# Altium PCB uTCA_MCH_PCB3.pcbdoc (part 6 of 8)
Units mm, origin at the board's own origin, x right, y up, seen from the top; angles counter-clockwise.
Board outline 182.75 x 75.8 mm, 10 copper layers (Top Layer, GND1, MidLayer1, PWR1, Mid-Layer 2, GND2, PWR2, Mid-Layer 3, GND3, Bottom Layer), stack 1.568 mm thick; 778 components, 977 nets, 4756 pads, 1214 vias.
Unrouted connection lines stored in the file: 1790.
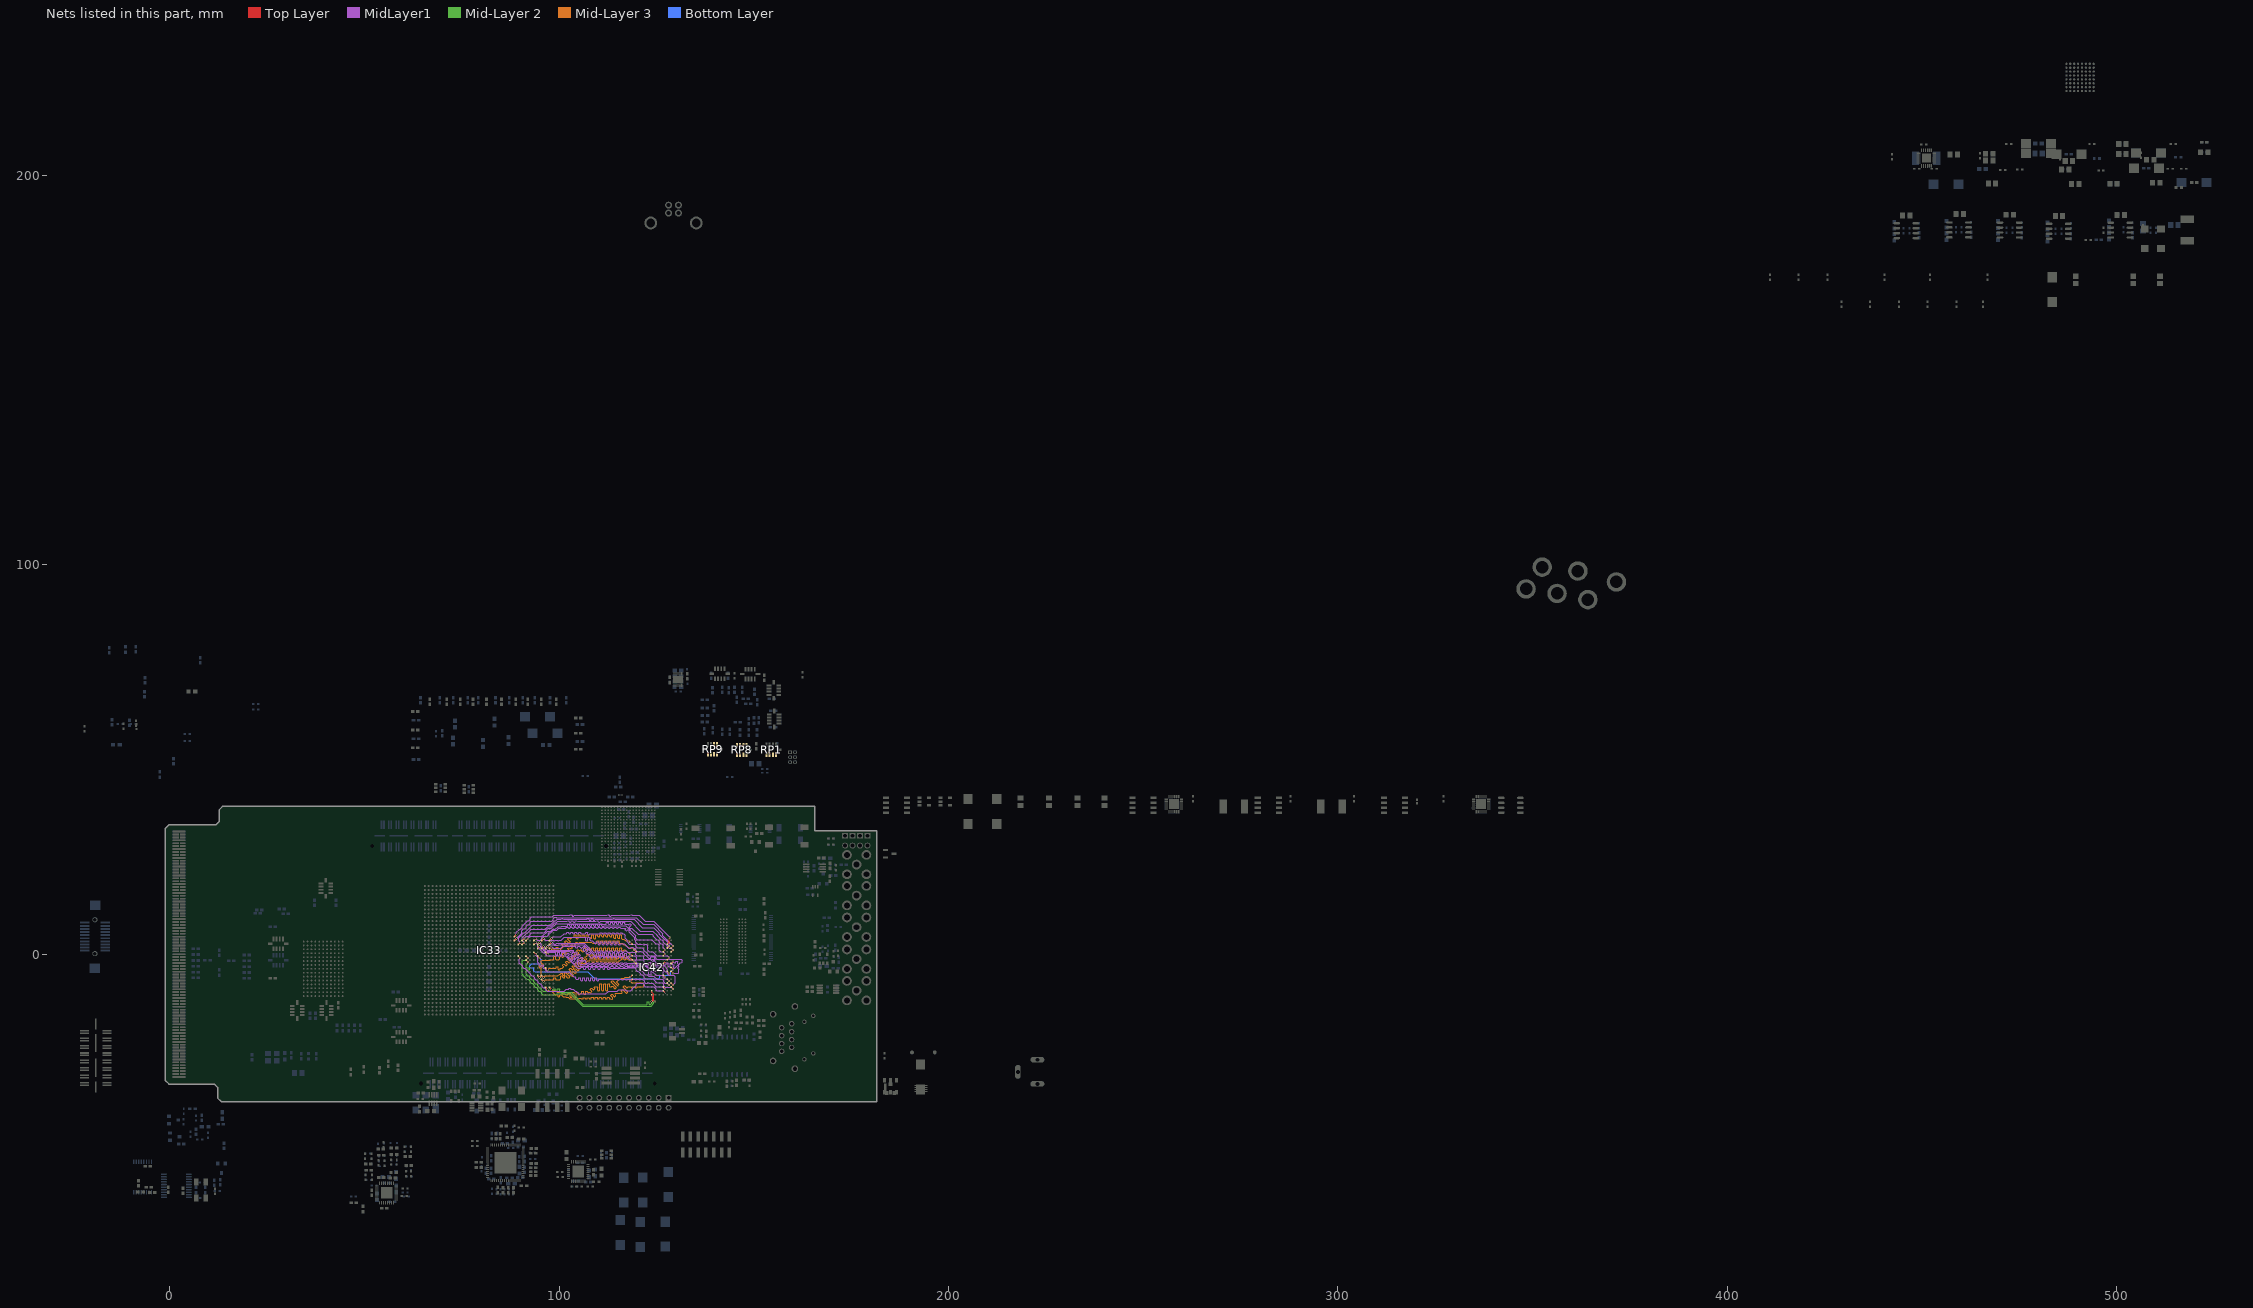
[diagram p14: the nets of this part, all layers, seen from the top]

## Via types
v1: diameter 0.5, hole 0.2, Top Layer to Bottom Layer, 1149 vias
v2: diameter 0.508, hole 0.254, Top Layer to Bottom Layer, 32 vias
v3: diameter 0.66, hole 0.33, Top Layer to Bottom Layer, tented top, 29 vias
v4: diameter 0.5, hole 0.2, Top Layer to Bottom Layer, tented top, 4 vias

## Nets (pads, with @x,y where several pads share a name; then routed paths per layer and width w, separated by ;. In a path a pad name is that pad's centre, name@x,y a point inside that pad or via, vN(x,y) a via of type N, cw(c..) or ccw(c..) an arc to the next point about the centre after c; other vN are vias at no path point) (continued)
Q1_D18: IC33.K19 IC42.B3 RP9.8 | length 48.1
  Top Layer w0.175: IC33.K19@89.5,-0.5 v1(90,-1) ; IC42.B3@126.75,-9.4 v1(127.25,-9.9)
  MidLayer1 w0.109: v1(90,-1) 89.571,-1.429 89.571,-2.178 89.822,-2.43 90.037,-2.43 90.571,-2.963 90.571,-3.178 90.963,-3.571 91.178,-3.571 92.571,-4.963 92.571,-5.178 92.963,-5.571 93.178,-5.571 93.571,-5.963 93.571,-6.178 93.963,-6.571 94.178,-6.571 94.571,-6.963 94.571,-7.178 94.963,-7.571 95.178,-7.571 95.571,-7.963 95.571,-8.178 95.963,-8.571 96.178,-8.571 96.571,-8.963 96.571,-9.178 96.943,-9.55 101.35,-9.55 101.85,-9.05 102.355,-9.05 102.458,-8.947 102.458,-8.809 102.561,-8.706 102.87,-8.706 102.973,-8.809 102.973,-8.947 103.076,-9.05 103.6,-9.05 104.1,-9.55 104.35,-9.55 105,-10.2 112,-10.2 112.7,-9.5 114.95,-9.5 115.3,-9.15 117,-9.15 117.18,-9.33 118.428,-9.33 118.87,-8.887 118.87,-8.772 119.122,-8.52 119.237,-8.52 119.82,-7.937 119.82,-7.722 120.072,-7.471 121.428,-7.471 121.82,-7.863 121.82,-8.078 122.143,-8.4 124.357,-8.4 124.82,-8.863 124.82,-9.078 125.093,-9.35 126.7,-9.35 v1(127.25,-9.9)
Q1_D19: IC33.F18 IC42.C3 RP9.7 | length 48.2
  Top Layer w0.175: IC33.F18@93.5,0.5 v1(94,0) ; IC42.C3@126.75,-8.4 v1(127.25,-8.9)
  MidLayer1 w0.109: v1(94,0) 94,-0.3 94.45,-0.75 94.45,-2.057 94.924,-2.531 94.924,-2.677 94.86,-2.741 94.86,-2.886 95.079,-3.105 95.225,-3.105 95.361,-2.969 95.623,-2.707 95.769,-2.707 95.987,-2.926 95.987,-3.071 95.798,-3.26 95.798,-3.406 95.963,-3.571 96.178,-3.571 96.571,-3.963 96.571,-4.178 96.893,-4.5 102.5,-4.5 103.78,-5.78 103.926,-5.78 103.948,-5.759 104.094,-5.759 104.313,-5.977 104.313,-6.123 104.291,-6.145 104.291,-6.291 104.4,-6.4 104.935,-6.4 105.038,-6.297 105.038,-6.103 105.141,-6 105.451,-6 105.554,-6.103 105.554,-6.697 105.657,-6.8 105.966,-6.8 106.069,-6.697 106.069,-6.103 106.172,-6 106.481,-6 106.585,-6.103 106.585,-6.697 106.688,-6.8 106.997,-6.8 107.1,-6.697 107.1,-6.103 107.203,-6 107.512,-6 107.615,-6.103 107.615,-6.697 107.718,-6.8 108.028,-6.8 108.131,-6.697 108.131,-6.103 108.234,-6 108.543,-6 108.646,-6.103 108.646,-6.697 108.749,-6.8 109.058,-6.8 109.162,-6.697 109.162,-6.103 109.265,-6 109.574,-6 109.677,-6.103 109.677,-6.697 109.78,-6.8 110.089,-6.8 110.192,-6.697 110.192,-6.503 110.295,-6.4 114.965,-6.4 115.065,-6.5 115.381,-6.5 115.481,-6.4 115.996,-6.4 116.096,-6.5 116.412,-6.5 116.512,-6.4 117.027,-6.4 117.127,-6.5 117.442,-6.5 117.542,-6.4 118.373,-6.4 118.473,-6.5 118.788,-6.5 118.888,-6.4 119.404,-6.4 119.504,-6.5 119.819,-6.5 119.919,-6.4 120.435,-6.4 120.535,-6.5 120.85,-6.5 120.95,-6.4 121.357,-6.4 121.8,-6.843 121.8,-7.1 122.1,-7.4 122.608,-7.4 122.708,-7.3 123.023,-7.3 123.123,-7.4 124,-7.4 125,-8.4 126.5,-8.4 127,-8.9 v1(127.25,-8.9)
Q1_D20: IC33.E17 IC42.D2 RP9.5 | length 48.3
  Top Layer w0.175: IC33.E17@94.5,1.5 v1(95,2) ; IC42.D2@127.75,-7.4 v1(128.25,-7.9)
  MidLayer1 w0.109: v1(95,2) 96.434,0.566 99.02,0.566 99.123,0.463 99.123,-0.092 99.226,-0.196 99.535,-0.196 99.638,-0.092 99.638,0.463 99.742,0.566 100.051,0.566 100.154,0.463 100.154,-0.092 100.257,-0.196 100.566,-0.196 100.669,-0.092 100.669,0.463 100.772,0.566 101.484,0.566 101.593,0.457 101.593,0.311 101.448,0.166 101.448,0.02 101.667,-0.199 101.813,-0.199 102.031,0.019 102.242,0.231 102.388,0.231 102.607,0.012 102.607,-0.133 102.395,-0.345 102.208,-0.532 102.208,-0.678 102.427,-0.896 102.573,-0.896 102.76,-0.71 102.971,-0.498 103.117,-0.498 103.336,-0.717 103.336,-0.862 103.124,-1.074 102.937,-1.261 102.937,-1.406 103.156,-1.625 103.302,-1.625 103.7,-1.227 103.846,-1.227 104.065,-1.445 104.065,-1.591 103.853,-1.803 103.666,-1.99 103.666,-2.135 103.885,-2.354 104.031,-2.354 104.217,-2.167 104.429,-1.956 104.575,-1.956 104.793,-2.174 104.793,-2.32 104.655,-2.459 104.655,-2.605 105.1,-3.05 112.511,-3.05 112.635,-3.173 112.635,-3.243 112.758,-3.366 113.127,-3.366 113.25,-3.243 113.25,-3.173 113.373,-3.05 113.742,-3.05 113.865,-3.173 113.865,-3.243 113.988,-3.366 114.358,-3.366 114.481,-3.243 114.481,-3.173 114.604,-3.05 114.973,-3.05 115.096,-3.173 115.096,-3.243 115.219,-3.366 115.588,-3.366 115.712,-3.243 115.712,-3.173 115.835,-3.05 116.204,-3.05 116.327,-3.173 116.327,-3.243 116.45,-3.366 116.819,-3.366 116.942,-3.243 116.942,-3.173 117.065,-3.05 117.316,-3.05 117.45,-3.184 120.141,-3.184 120.82,-3.863 120.82,-4.078 121.072,-4.33 121.287,-4.33 121.679,-4.722 121.679,-4.937 122.072,-5.33 122.68,-5.33 122.984,-5.634 124.334,-5.634 125.15,-6.45 126.5,-6.45 126.82,-6.77 126.82,-7.078 127.143,-7.4 127.75,-7.4 v1(128.25,-7.9)
Q1_D21: IC33.D17 IC42.F3 RP9.4 | length 41.8
  Top Layer w0.175: IC33.D17@95.5,1.5 v1(96,2) ; IC42.F3@126.75,-5.4 v1(127.25,-5.9)
  MidLayer1 w0.109: v1(96,2) 96.934,1.066 103.584,1.066 103.693,0.957 103.693,0.811 103.627,0.745 103.627,0.599 103.846,0.38 103.991,0.38 104.131,0.519 104.27,0.659 104.416,0.659 104.634,0.44 104.634,0.294 104.495,0.155 104.356,0.016 104.356,-0.13 104.575,-0.349 104.72,-0.349 104.999,-0.07 105.145,-0.07 105.363,-0.289 105.363,-0.435 105.085,-0.713 105.085,-0.859 105.303,-1.078 105.449,-1.078 105.728,-0.799 105.873,-0.799 106.092,-1.018 106.092,-1.164 105.814,-1.442 105.814,-1.588 106.032,-1.807 106.178,-1.807 106.457,-1.528 106.602,-1.528 106.821,-1.747 106.821,-1.893 106.755,-1.959 106.755,-2.105 107,-2.35 107.411,-2.35 107.611,-2.15 107.92,-2.15 108.12,-2.35 108.442,-2.35 108.642,-2.15 108.951,-2.15 109.151,-2.35 109.472,-2.35 109.672,-2.15 109.982,-2.15 110.182,-2.35 110.503,-2.35 110.703,-2.15 111.012,-2.15 111.212,-2.35 111.534,-2.35 111.734,-2.15 112.043,-2.15 112.243,-2.35 112.565,-2.35 112.765,-2.15 113.074,-2.15 113.274,-2.35 113.596,-2.35 113.796,-2.15 114.105,-2.15 114.305,-2.35 114.626,-2.35 114.826,-2.15 115.136,-2.15 115.336,-2.35 115.657,-2.35 115.857,-2.15 116.166,-2.15 116.366,-2.35 116.688,-2.35 116.888,-2.15 117.197,-2.15 117.397,-2.35 119.7,-2.35 120,-2.65 121.731,-2.65 122.715,-3.634 123.534,-3.634 124.3,-4.4 126.45,-4.4 126.75,-4.7 126.75,-5.25 127.15,-5.65 127.15,-5.9 v1(127.25,-5.9)
Q1_D22: IC33.C17 IC42.G2 RP9.3 | length 48.1
  Top Layer w0.175: IC33.C17@96.5,1.5 v1(97,2) ; IC42.G2@127.75,-4.4 v1(128.25,-4.9)
  MidLayer1 w0.109: v1(97,2) 97.479,2.479 98.54,2.479 98.683,2.337 99.829,2.337 99.959,2.466 106.284,2.466 109.1,-0.35 109.505,-0.35 109.608,-0.247 109.608,0.213 109.711,0.316 110.02,0.316 110.123,0.213 110.123,-0.247 110.226,-0.35 110.535,-0.35 110.638,-0.247 110.638,0.213 110.742,0.316 111.051,0.316 111.154,0.213 111.154,-0.247 111.257,-0.35 111.566,-0.35 111.669,-0.247 111.669,0.213 111.772,0.316 112.082,0.316 112.185,0.213 112.185,-0.247 112.288,-0.35 112.597,-0.35 112.7,-0.247 112.7,0.213 112.803,0.316 113.112,0.316 113.215,0.213 113.215,-0.247 113.319,-0.35 113.628,-0.35 113.731,-0.247 113.731,0.213 113.834,0.316 114.143,0.316 114.246,0.213 114.246,-0.247 114.349,-0.35 114.659,-0.35 114.762,-0.247 114.762,0.213 114.865,0.316 115.174,0.316 115.277,0.213 115.277,-0.247 115.38,-0.35 115.689,-0.35 115.792,-0.247 115.792,0.193 115.896,0.296 116.205,0.296 116.308,0.193 116.308,-0.247 116.411,-0.35 116.72,-0.35 116.823,-0.247 116.823,0.193 116.926,0.296 117.236,0.296 117.339,0.193 117.339,-0.563 117.442,-0.666 117.751,-0.666 117.854,-0.563 117.854,-0.453 117.957,-0.35 119.307,-0.35 119.75,-0.793 119.75,-1.25 119.9,-1.4 121.357,-1.4 121.679,-1.722 121.679,-1.937 122.743,-3 122.897,-3 123,-2.897 123,-2.103 123.103,-2 123.413,-2 123.516,-2.103 123.516,-2.897 123.619,-3 123.928,-3 124.031,-2.897 124.031,-2.777 124.134,-2.674 124.443,-2.674 124.546,-2.777 124.546,-2.897 124.65,-3 126.957,-3 127.821,-3.863 127.821,-4.521 128.2,-4.9 v1(128.25,-4.9)
Q1_D23: IC33.D15 IC42.J3 RP9.2 | length 48
  Top Layer w0.175: IC33.D15@95.5,3.5 v1(96,4) ; IC42.J3@126.75,-2.4 v1(127.25,-1.9)
  MidLayer1 w0.109: v1(96,4) 96.45,3.55 97.423,3.55 97.523,3.45 97.838,3.45 97.938,3.55 98.454,3.55 98.554,3.45 98.869,3.45 98.969,3.55 99.485,3.55 99.585,3.45 99.9,3.45 100,3.55 100.5,3.55 101.25,4.3 106.774,4.3 106.877,4.197 106.877,3.503 106.98,3.4 107.289,3.4 107.392,3.503 107.392,4.197 107.495,4.3 107.65,4.3 107.955,3.995 107.955,3.849 107.913,3.806 107.913,3.66 108.131,3.442 108.277,3.442 108.32,3.484 108.466,3.484 109.296,2.654 109.451,2.654 109.554,2.757 109.554,3.151 109.657,3.254 109.966,3.254 110.069,3.151 110.069,2.537 110.172,2.434 110.482,2.434 110.585,2.537 110.585,3.151 110.688,3.254 110.997,3.254 111.1,3.151 111.1,2.537 111.203,2.434 111.512,2.434 111.616,2.537 111.616,3.151 111.719,3.254 112.028,3.254 112.131,3.151 112.131,2.537 112.234,2.434 112.543,2.434 112.646,2.537 112.646,3.151 112.749,3.254 113.059,3.254 113.162,3.151 113.162,2.537 113.265,2.434 113.574,2.434 113.677,2.537 113.677,3.151 113.78,3.254 114.089,3.254 114.193,3.151 114.193,2.537 114.296,2.434 114.605,2.434 114.708,2.537 114.708,3.151 114.811,3.254 115.12,3.254 115.223,3.151 115.223,2.537 115.326,2.434 115.636,2.434 115.739,2.537 115.739,2.539 115.85,2.65 116.75,2.65 116.95,2.45 117.373,2.027 117.85,1.55 118.357,1.55 118.557,1.75 118.942,1.75 119.142,1.55 119.407,1.55 119.679,1.278 119.679,1.063 120.143,0.6 120.4,0.6 120.55,0.75 120.993,0.75 121.072,0.671 121.287,0.671 121.679,0.278 121.679,0.063 122.072,-0.329 122.287,-0.329 123.053,-1.095 123.405,-1.095 123.5,-1 123.5,-0.734 123.6,-0.634 124.234,-0.634 124.55,-0.95 124.55,-1.35 124.6,-1.4 124.6,-1.857 125.093,-2.35 126.8,-2.35 v1(127.25,-1.9)
Q1_D24: IC33.H15 IC42.L3 RP8.10 | length 48
  Top Layer w0.175: IC33.H15@91.5,3.5 v1(92,4) ; IC42.L3@126.75,-0.4 v1(127.25,0.1)
  MidLayer1 w0.109: v1(92,4) 92.571,4.571 95.632,4.571 97.012,5.95 97.85,5.95 98.35,6.45 99.057,6.45 99.707,7.1 100.55,7.1 100.652,7.202 102.085,7.202 102.188,7.305 102.188,7.547 102.292,7.65 102.601,7.65 102.704,7.547 102.704,7.305 102.807,7.202 103.116,7.202 103.219,7.305 103.219,7.547 103.322,7.65 103.632,7.65 103.735,7.547 103.735,7.305 103.838,7.202 104.147,7.202 104.25,7.305 104.25,7.547 104.353,7.65 104.662,7.65 104.765,7.547 104.765,7.305 104.869,7.202 105.178,7.202 105.281,7.305 105.281,7.547 105.384,7.65 105.693,7.65 105.796,7.547 105.796,7.305 105.899,7.202 106.209,7.202 106.312,7.305 106.312,7.547 106.415,7.65 106.724,7.65 106.827,7.547 106.827,7.305 106.93,7.202 107.239,7.202 107.342,7.305 107.342,7.547 107.446,7.65 107.755,7.65 107.858,7.547 107.858,7.305 107.961,7.202 108.27,7.202 108.373,7.305 108.373,7.547 108.476,7.65 108.786,7.65 108.889,7.547 108.889,7.305 108.992,7.202 109.301,7.202 109.404,7.305 109.404,7.547 109.507,7.65 109.816,7.65 109.919,7.547 109.919,7.305 110.023,7.202 110.332,7.202 110.435,7.305 110.435,7.547 110.538,7.65 110.847,7.65 110.95,7.547 110.95,7.305 111.053,7.202 111.452,7.202 111.55,7.3 117.105,7.3 119.65,4.755 119.65,4.093 120.072,3.67 120.428,3.67 121.072,3.671 121.428,3.67 123.829,3.671 124.829,2.671 125.287,2.671 125.68,2.278 125.68,1.063 126.072,0.671 126.68,0.671 v1(127.25,0.1)
Q1_D25: IC33.J15 IC42.M3 RP8.9 | length 48.2
  Top Layer w0.175: IC33.J15@90.5,3.5 v1(91,4) ; IC42.M3@126.75,0.6 v1(127.25,1.1)
  MidLayer1 w0.109: v1(91,4) 91.571,4.571 92.178,4.571 92.571,4.963 92.571,5.178 92.963,5.571 96.178,5.571 97.257,6.65 98,6.65 99.234,7.884 110.944,7.884 111.128,7.7 112.055,7.7 112.158,7.803 112.158,8.097 112.261,8.2 112.57,8.2 112.673,8.097 112.673,7.803 112.776,7.7 113.085,7.7 113.188,7.803 113.188,8.097 113.292,8.2 113.601,8.2 113.704,8.097 113.704,7.803 113.807,7.7 114.116,7.7 114.219,7.803 114.219,8.097 114.322,8.2 114.632,8.2 114.735,8.097 114.735,7.803 114.838,7.7 115.147,7.7 115.25,7.803 115.25,8.097 115.353,8.2 115.662,8.2 115.765,8.097 115.765,7.803 115.869,7.7 116.178,7.7 116.281,7.803 116.281,8.097 116.384,8.2 116.693,8.2 116.796,8.097 116.796,7.803 116.899,7.7 117.7,7.7 117.809,7.591 117.955,7.591 118.163,7.798 118.309,7.798 118.527,7.58 118.527,7.434 118.247,7.153 117.988,6.894 117.988,6.748 118.206,6.53 118.352,6.53 118.538,6.716 118.684,6.716 120.3,5.1 123.85,5.1 124.193,4.757 124.193,4.55 125.072,3.671 125.287,3.671 125.68,3.278 125.68,3.063 126.072,2.671 126.287,2.671 126.68,2.278 126.68,1.671 v1(127.25,1.1)
Q1_D26: IC33.K16 IC42.N2 RP8.8 | length 48.2
  Top Layer w0.175: IC33.K16@89.5,2.5 v1(90,3) ; IC42.N2@127.75,1.6 v1(128.25,2.1)
  MidLayer1 w0.109: v1(90,3) 89.571,3.43 89.571,4.178 90.963,5.571 91.221,5.571 93.08,7.43 97.73,7.43 98.871,8.571 99.178,8.571 99.557,8.95 100.411,8.95 100.611,9.15 100.92,9.15 101.12,8.95 107.061,8.95 107.261,9.15 107.57,9.15 107.673,9.047 107.673,8.853 107.776,8.75 108.085,8.75 108.188,8.853 108.188,9.047 108.292,9.15 108.601,9.15 108.704,9.047 108.704,8.853 108.807,8.75 109.116,8.75 109.316,8.95 113.661,8.95 113.861,9.15 114.17,9.15 114.37,8.95 119.25,8.95 121.35,6.85 124.25,6.85 125.657,5.443 125.657,5.093 126.68,4.07 126.68,4.063 127.072,3.671 127.287,3.671 128.25,2.707 v1(128.25,2.1)
Q1_D27: IC33.F16 IC42.C1 RP8.7 | length 48.2
  Top Layer w0.175: IC33.F16@93.5,2.5 v1(94,3) ; IC42.C1@128.75,-8.4 v1(129.25,-8.9)
  MidLayer1 w0.109: v1(94,3) 94.571,2.43 94.571,1.822 95.963,0.43 96.178,0.43 96.571,0.037 96.571,-0.178 96.822,-0.43 101.63,-0.43 104.8,-3.6 105.485,-3.6 105.608,-3.477 105.608,-3.423 105.731,-3.3 106.1,-3.3 106.223,-3.423 106.223,-3.777 106.346,-3.9 106.715,-3.9 106.838,-3.777 106.838,-3.423 106.962,-3.3 107.331,-3.3 107.454,-3.423 107.454,-3.777 107.577,-3.9 107.946,-3.9 108.069,-3.777 108.069,-3.423 108.192,-3.3 108.562,-3.3 108.685,-3.423 108.685,-3.777 108.808,-3.9 109.177,-3.9 109.3,-3.777 109.3,-3.423 109.423,-3.3 109.792,-3.3 109.915,-3.423 109.915,-3.777 110.039,-3.9 110.408,-3.9 110.531,-3.777 110.531,-3.423 110.654,-3.3 111.023,-3.3 111.146,-3.423 111.146,-3.777 111.269,-3.9 111.639,-3.9 111.762,-3.777 111.762,-3.423 111.885,-3.3 112.254,-3.3 112.377,-3.423 112.377,-3.777 112.5,-3.9 112.869,-3.9 112.992,-3.777 112.992,-3.723 113.116,-3.6 117.45,-3.6 117.632,-3.418 119.375,-3.418 119.679,-3.722 119.679,-3.937 120.072,-4.33 120.287,-4.33 120.82,-4.863 120.82,-5.078 121.072,-5.33 121.287,-5.33 121.679,-5.722 121.679,-5.937 122.072,-6.33 124.08,-6.33 124.82,-7.07 124.82,-7.078 125.093,-7.35 126.5,-7.35 126.75,-7.6 126.75,-8.007 127.193,-8.45 128.8,-8.45 v1(129.25,-8.9)
Q1_D28: IC33.B17 IC42.D1 RP8.5 | length 48.2
  Top Layer w0.175: IC33.B17@97.5,1.5 98,2 v1(97.95,2.05) ; IC42.D1@128.75,-7.4 v1(129.25,-7.9)
  MidLayer1 w0.109: v1(97.95,2.05) 98.45,1.55 100.418,1.55 100.918,2.05 104.182,2.05 104.285,1.947 104.285,1.717 104.388,1.613 104.697,1.613 104.8,1.717 104.8,1.947 104.903,2.05 ; 104.892,2.05 104.903,2.05 ; v1(129.25,-7.9) 129.68,-7.471 129.68,-5.722 129.407,-5.45 128.193,-5.45 127.821,-5.078 127.821,-4.863 127.478,-4.52 127.263,-4.52 126.8,-4.057 126.8,-3.843 126.357,-3.4 124.792,-3.4 124.688,-3.503 124.688,-3.597 124.585,-3.7 124.276,-3.7 124.173,-3.597 124.173,-3.503 124.07,-3.4 122.812,-3.4 121.741,-2.329 120.072,-2.329 119.679,-1.937 119.679,-1.722 119.357,-1.4 118.143,-1.4 117.643,-0.9 116.542,-0.9 116.439,-0.797 116.439,-0.687 116.336,-0.584 116.026,-0.584 115.923,-0.687 115.923,-0.797 115.82,-0.9 115.511,-0.9 115.408,-0.797 115.408,-0.687 115.305,-0.584 114.996,-0.584 114.892,-0.687 114.892,-0.797 114.789,-0.9 114.48,-0.9 114.377,-0.797 114.377,-0.687 114.274,-0.584 113.965,-0.584 113.862,-0.687 113.862,-0.797 113.759,-0.9 113.449,-0.9 113.346,-0.797 113.346,-0.687 113.243,-0.584 112.934,-0.584 112.831,-0.687 112.831,-0.797 112.728,-0.9 112.419,-0.9 112.315,-0.797 112.315,-0.687 112.212,-0.584 111.903,-0.584 111.8,-0.687 111.8,-0.797 111.697,-0.9 111.388,-0.9 111.285,-0.797 111.285,-0.687 111.182,-0.584 110.872,-0.584 110.769,-0.687 110.769,-0.797 110.666,-0.9 110.357,-0.9 110.254,-0.797 110.254,-0.687 110.151,-0.584 109.842,-0.584 109.738,-0.687 109.738,-0.797 109.635,-0.9 109.326,-0.9 109.223,-0.797 109.223,-0.687 109.12,-0.584 108.811,-0.584 108.708,-0.687 108.708,-0.797 108.605,-0.9 108.1,-0.9 107.626,-0.426 107.626,-0.28 108.09,0.183 108.09,0.329 107.871,0.548 107.726,0.548 107.262,0.084 107.116,0.084 106.897,0.303 106.897,0.448 107.361,0.912 107.361,1.058 107.142,1.277 106.997,1.277 106.533,0.813 106.387,0.813 106.168,1.032 106.168,1.177 106.632,1.641 106.632,1.787 106.414,2.006 106.268,2.006 105.804,1.542 105.658,1.542 105.15,2.05 104.903,2.05
Q1_D29: IC33.E16 IC42.E2 RP8.4 | length 48.2
  Top Layer w0.175: IC33.E16@94.5,2.5 v1(95,3) ; IC42.E2@127.75,-6.4 v1(128.25,-6.9)
  MidLayer1 w0.109: v1(95,3) 95.43,2.571 95.43,1.963 96.593,0.8 102.55,0.8 102.834,0.516 102.98,0.516 103.094,0.629 103.24,0.629 103.458,0.411 103.458,0.265 103.272,0.078 103.145,-0.049 103.145,-0.195 103.363,-0.413 103.509,-0.413 103.636,-0.286 103.823,-0.099 103.969,-0.099 104.187,-0.318 104.187,-0.464 104.001,-0.651 103.873,-0.778 103.873,-0.923 104.092,-1.142 104.238,-1.142 104.365,-1.015 104.552,-0.828 104.697,-0.828 104.916,-1.047 104.916,-1.193 104.602,-1.507 104.602,-1.652 104.821,-1.871 104.967,-1.871 105.094,-1.744 105.281,-1.557 105.426,-1.557 105.645,-1.776 105.645,-1.922 105.458,-2.108 105.248,-2.318 105.248,-2.464 105.467,-2.683 105.613,-2.683 105.696,-2.6 105.95,-2.6 106.05,-2.7 106.658,-2.7 106.758,-2.6 107.073,-2.6 107.273,-2.8 107.588,-2.8 107.788,-2.6 108.104,-2.6 108.304,-2.8 108.619,-2.8 108.819,-2.6 109.135,-2.6 109.335,-2.8 109.65,-2.8 109.85,-2.6 110.165,-2.6 110.365,-2.8 110.681,-2.8 110.881,-2.6 111.196,-2.6 111.396,-2.8 111.712,-2.8 111.912,-2.6 112.227,-2.6 112.427,-2.8 112.742,-2.8 112.942,-2.6 113.258,-2.6 113.458,-2.8 113.773,-2.8 113.973,-2.6 114.289,-2.6 114.489,-2.8 114.804,-2.8 115.004,-2.6 115.319,-2.6 115.519,-2.8 115.835,-2.8 116.035,-2.6 116.35,-2.6 116.55,-2.8 116.866,-2.8 117.066,-2.6 117.381,-2.6 117.481,-2.7 117.481,-2.831 117.6,-2.95 118.105,-2.95 118.208,-2.847 118.208,-2.753 118.311,-2.65 118.62,-2.65 118.723,-2.753 118.723,-2.847 118.826,-2.95 119.135,-2.95 119.238,-2.847 119.238,-2.753 119.342,-2.65 119.651,-2.65 119.754,-2.753 119.754,-2.847 119.857,-2.95 120.907,-2.95 121.679,-3.722 121.679,-3.937 122.072,-4.33 122.455,-4.33 122.558,-4.226 122.558,-4.2 122.661,-4.097 122.97,-4.097 123.073,-4.2 123.073,-5.126 123.176,-5.23 123.485,-5.23 123.588,-5.126 123.588,-4.433 123.692,-4.33 123.83,-4.33 124.9,-5.4 126.5,-5.4 126.75,-5.65 126.75,-6.007 127.072,-6.33 127.68,-6.33 v1(128.25,-6.9)
Q1_D30: IC33.B16 IC42.G1 RP8.3 | length 48.2
  Top Layer w0.175: IC33.B16@97.5,2.5 v1(98,3) ; IC42.G1@128.75,-4.4 v1(129.25,-4.9)
  MidLayer1 w0.109: v1(98,3) 98.35,3 98.779,2.571 99.178,2.571 99.407,2.8 106.45,2.8 108.85,0.4 109.2,0.4 109.358,0.558 109.358,0.727 109.481,0.85 109.85,0.85 109.973,0.727 109.973,0.673 110.096,0.55 110.465,0.55 110.588,0.673 110.588,0.727 110.712,0.85 111.081,0.85 111.204,0.727 111.204,0.673 111.327,0.55 111.696,0.55 111.819,0.673 111.819,0.727 111.942,0.85 112.312,0.85 112.435,0.727 112.435,0.673 112.558,0.55 112.927,0.55 113.05,0.673 113.05,0.727 113.173,0.85 113.542,0.85 113.665,0.727 113.665,0.673 113.789,0.55 114.158,0.55 114.281,0.673 114.281,0.727 114.404,0.85 114.773,0.85 114.896,0.727 114.896,0.673 115.019,0.55 115.389,0.55 115.512,0.673 115.512,0.727 115.635,0.85 116.004,0.85 116.127,0.727 116.127,0.673 116.25,0.55 116.619,0.55 116.742,0.673 116.742,0.727 116.866,0.85 117.235,0.85 117.358,0.727 117.358,0.642 117.45,0.55 119.407,0.55 119.679,0.278 119.679,-0.179 119.9,-0.4 121.45,-0.4 121.679,-0.629 121.679,-1.129 121.879,-1.329 123.429,-1.329 123.616,-1.516 123.762,-1.516 123.976,-1.302 124.121,-1.302 124.3,-1.481 124.3,-1.707 124.053,-1.953 123.931,-2.076 123.931,-2.222 124.149,-2.44 124.295,-2.44 124.345,-2.391 124.491,-2.391 124.75,-2.65 127.435,-2.65 127.538,-2.547 127.538,-2.311 127.642,-2.208 127.951,-2.208 128.054,-2.311 128.054,-3.147 128.157,-3.25 128.466,-3.25 128.569,-3.147 128.569,-2.338 128.672,-2.235 128.982,-2.235 129.085,-2.338 129.085,-2.547 129.188,-2.65 129.5,-2.65 129.609,-2.759 129.609,-2.905 129.331,-3.184 129.331,-3.329 129.55,-3.548 129.695,-3.548 130.047,-3.197 130.398,-2.845 130.544,-2.845 130.762,-3.064 130.762,-3.21 130.484,-3.488 130.484,-3.634 130.7,-3.85 130.7,-4.75 130.55,-4.9 v1(129.25,-4.9) v1@129.25,-4.8
Q1_D31: IC33.B15 IC42.J1 RP8.2 | length 48.2
  Top Layer w0.175: IC33.B15@97.5,3.5 v1(98,4) ; IC42.J1@128.75,-2.4 v1(129.25,-1.9)
  MidLayer1 w0.109: v1(98,4) 98.43,4.43 100.38,4.43 101.25,5.3 101.866,5.3 101.969,5.403 101.969,5.497 102.072,5.6 102.381,5.6 102.485,5.497 102.485,5.403 102.588,5.3 102.897,5.3 103,5.403 103,5.497 103.103,5.6 103.412,5.6 103.515,5.497 103.515,5.403 103.618,5.3 103.928,5.3 104.031,5.403 104.031,5.497 104.134,5.6 104.443,5.6 104.546,5.497 104.546,5.403 104.649,5.3 104.958,5.3 105.062,5.403 105.062,5.497 105.165,5.6 105.474,5.6 105.577,5.497 105.577,5.403 105.68,5.3 106.708,5.3 106.812,5.403 106.812,5.497 106.915,5.6 107.224,5.6 107.327,5.497 107.327,5.103 107.43,5 107.739,5 107.842,5.103 107.842,5.197 107.945,5.3 108.1,5.3 108.2,5.2 110.405,5.2 110.508,5.303 110.508,5.397 110.611,5.5 110.92,5.5 111.023,5.397 111.023,5.303 111.126,5.2 111.435,5.2 111.538,5.303 111.538,5.397 111.642,5.5 111.951,5.5 112.054,5.397 112.054,5.303 112.157,5.2 112.466,5.2 112.569,5.303 112.569,5.397 112.672,5.5 112.982,5.5 113.085,5.397 113.085,5.303 113.188,5.2 113.497,5.2 113.6,5.303 113.6,5.397 113.703,5.5 114.012,5.5 114.115,5.397 114.115,5.303 114.219,5.2 114.528,5.2 114.631,5.303 114.631,5.397 114.734,5.5 115.043,5.5 115.146,5.397 115.146,5.303 115.249,5.2 115.559,5.2 115.662,5.303 115.662,5.397 115.765,5.5 116.074,5.5 116.177,5.397 116.177,5.303 116.28,5.2 116.65,5.2 116.95,4.9 116.95,4.1 117.45,3.6 117.45,3.2 118.05,2.6 119.45,2.6 119.7,2.35 119.7,2.043 120.072,1.671 121.287,1.671 121.679,1.278 121.679,1.063 122.072,0.671 122.287,0.671 122.679,0.278 122.679,0.063 123.142,-0.4 124.45,-0.4 124.82,-0.771 124.82,-1.078 125.072,-1.329 131.329,-1.329 131.55,-1.55 131.55,-2 131.3,-2.25 131.095,-2.25 130.992,-2.353 130.992,-2.508 130.889,-2.611 130.58,-2.611 130.477,-2.508 130.477,-1.953 130.374,-1.85 130.065,-1.85 129.962,-1.953 129.962,-2.147 129.858,-2.25 129.6,-2.25 v1(129.25,-1.9)
Q1_D32: IC33.F15 IC42.K2 RP1.7 | length 48
  Top Layer w0.175: IC33.F15@93.5,3.5 v1(94,4) ; IC42.K2@127.75,-1.4 v1(128.25,-0.9)
  MidLayer1 w0.109: v1(94,4) 94.43,3.571 95.178,3.571 95.571,3.963 95.571,4.178 95.993,4.6 96.95,4.6 97.309,4.959 97.309,5.105 97.243,5.171 97.243,5.317 97.462,5.536 97.607,5.536 97.674,5.47 97.82,5.47 98.5,6.15 99.4,6.15 99.918,6.668 101.705,6.668 101.808,6.771 101.808,6.865 101.911,6.968 102.22,6.968 102.323,6.865 102.323,6.771 102.426,6.668 102.735,6.668 102.838,6.771 102.838,6.865 102.942,6.968 103.251,6.968 103.354,6.865 103.354,6.771 103.457,6.668 103.766,6.668 103.869,6.771 103.869,6.865 103.972,6.968 104.282,6.968 104.385,6.865 104.385,6.771 104.488,6.668 104.797,6.668 104.9,6.771 104.9,6.865 105.003,6.968 105.312,6.968 105.415,6.865 105.415,6.771 105.519,6.668 105.828,6.668 105.931,6.771 105.931,6.865 106.034,6.968 106.343,6.968 106.446,6.865 106.446,6.771 106.549,6.668 106.859,6.668 106.962,6.771 106.962,6.865 107.065,6.968 107.374,6.968 107.477,6.865 107.477,6.771 107.58,6.668 107.889,6.668 107.992,6.771 107.992,6.865 108.096,6.968 108.405,6.968 108.508,6.865 108.508,6.771 108.611,6.668 108.92,6.668 109.023,6.771 109.023,6.865 109.126,6.968 109.436,6.968 109.539,6.865 109.539,6.771 109.642,6.668 109.951,6.668 110.054,6.771 110.054,6.865 110.157,6.968 110.466,6.968 110.569,6.865 110.569,6.771 110.673,6.668 110.982,6.668 111.085,6.771 111.085,6.865 111.188,6.968 111.497,6.968 111.6,6.865 111.6,6.771 111.703,6.668 112.013,6.668 112.116,6.771 112.116,6.865 112.219,6.968 112.528,6.968 112.631,6.865 112.631,6.771 112.734,6.668 113.043,6.668 113.146,6.771 113.146,6.865 113.25,6.968 113.559,6.968 113.662,6.865 113.662,6.771 113.765,6.668 114.074,6.668 114.177,6.771 114.177,6.865 114.28,6.968 114.59,6.968 114.693,6.865 114.693,6.771 114.796,6.668 115.105,6.668 115.208,6.771 115.208,6.865 115.311,6.968 115.62,6.968 115.723,6.865 115.723,6.771 115.827,6.668 116.982,6.668 117.091,6.559 117.091,6.413 117.025,6.347 117.025,6.201 117.244,5.982 117.389,5.982 117.529,6.121 117.668,6.261 117.814,6.261 118.032,6.042 118.032,5.896 117.966,5.83 117.966,5.684 119.409,4.241 119.409,3.732 119.679,3.461 119.679,3.063 120.143,2.6 121.374,2.6 121.597,2.377 121.889,2.377 121.992,2.48 121.992,2.497 122.095,2.6 122.357,2.6 122.75,2.207 122.75,0.993 123.143,0.6 124.05,0.6 125.05,-0.4 127.75,-0.4 v1(128.25,-0.9)
Q1_D33: IC33.J16 IC42.M1 RP1.8 | length 48.4
  Top Layer w0.175: IC33.J16@90.5,2.5 v1(91,3) ; IC42.M1@128.75,0.6 v1(129.25,1.1)
  MidLayer1 w0.109: v1(91,3) 90.571,3.43 90.571,4.178 92.822,6.43 96.38,6.43 97.05,7.1 97.9,7.1 98.918,8.118 99.318,8.118 99.634,8.434 102.011,8.434 102.211,8.634 102.52,8.634 102.623,8.531 102.623,8.337 102.726,8.234 103.035,8.234 103.138,8.337 103.138,8.531 103.242,8.634 103.551,8.634 103.654,8.531 103.654,8.337 103.757,8.234 104.066,8.234 104.169,8.337 104.169,8.531 104.272,8.634 104.582,8.634 104.782,8.434 109.461,8.434 109.661,8.634 109.97,8.634 110.073,8.531 110.073,8.337 110.176,8.234 110.485,8.234 110.685,8.434 118.366,8.434 120.85,5.95 124.05,5.95 125.157,4.843 125.157,4.8 125.82,4.137 125.82,3.922 126.072,3.671 126.287,3.671 126.68,3.278 126.68,3.063 127.072,2.671 127.287,2.671 127.729,2.228 127.729,2.013 128.213,1.53 128.821,1.53 v1(129.25,1.1)
Q1_D34: IC33.L15 IC42.N1 RP1.9 | length 48
  Top Layer w0.175: IC33.L15@88.5,3.5 v1(89,4) ; IC42.N1@128.75,1.6 v1(129.25,2.1)
  MidLayer1 w0.109: v1(89,4) 90.43,5.43 90.43,6.037 90.963,6.571 91.178,6.571 91.571,6.963 91.571,7.178 91.963,7.571 92.178,7.571 92.571,7.963 92.571,8.178 92.893,8.5 98.107,8.5 98.45,8.843 98.45,9.057 98.822,9.43 99.22,9.43 99.25,9.4 119.85,9.4 121.55,7.7 124.25,7.7 126.65,5.3 126.65,4.692 129.242,2.1 v1(129.25,2.1)
Q1_D35: IC33.L14 IC42.P2 RP1.10 | length 48.2
  Top Layer w0.175: IC33.L14@88.5,4.5 v1(89,5) ; IC42.P2@127.75,2.6 128.25,3.1 128.25,4.05 v1(128.45,4.25)
  MidLayer1 w0.109: v1(89,5) 89,5.607 89.822,6.43 90.037,6.43 90.571,6.963 90.571,7.178 91.963,8.571 92.178,8.571 92.571,8.963 92.571,9.178 92.963,9.571 98.178,9.571 98.557,9.95 102.711,9.95 102.911,10.15 103.22,10.15 103.323,10.047 103.323,9.853 103.426,9.75 103.735,9.75 103.935,9.95 112.261,9.95 112.461,10.15 112.77,10.15 112.873,10.047 112.873,9.853 112.976,9.75 113.285,9.75 113.485,9.95 118.161,9.95 118.361,10.15 118.67,10.15 118.773,10.047 118.773,10.027 118.85,9.95 120.6,9.95 122.05,8.5 124.3,8.5 128.45,4.35 v1(128.45,4.25)
Q1_DOFF: IC33.E19 IC42.H1 | length 46.3
  Top Layer w0.175: IC33.E19@94.5,-0.5 v1(95,-1) ; IC42.H1@128.75,-3.4 v1(129.25,-3.9)
  Bottom Layer w0.175: v1(95,-1) 95.463,-1.462 95.463,-2.287 95.25,-2.5 92.95,-2.5 92.5,-2.95 92.5,-3.3 92.738,-3.538 93.192,-3.538 93.538,-3.883 93.538,-4.192 93.808,-4.463 107.313,-4.463 109.2,-6.35 118.046,-6.35 118.058,-6.363 125.442,-6.363 125.787,-6.017 125.787,-5.708 126.083,-5.412 128.392,-5.412 128.713,-5.092 128.713,-4.437 v1(129.25,-3.9)
Q1_K_N: IC33.H20 IC42.A6 | length 48.2
  Top Layer w0.125: IC33.H20@91.5,-1.5 92,-2 v1(92,-2.009) ; v1(123.75,-12.1) 123.812,-12.1 123.9,-12.1 124,-12 124,-10.958 123.75,-10.708 IC42.A6@123.75,-10.4
  MidLayer1 w0.1: v1(92,-2.009) v1@92,-2
  Mid-Layer 2 w0.1: 91.85,-5.55 91.86,-5.55 ; v1@92,-2 92,-2.3 91.5,-2.8 91.5,-3.4 91.634,-3.534 92.348,-3.534 92.5,-3.686 92.5,-3.888 92.348,-4.04 91.652,-4.04 91.5,-4.192 91.5,-5.19 91.86,-5.55 ; v1(123.75,-12.1) 123.812,-12.1 123.959,-12.246 123.959,-12.431 123.44,-12.95 123.211,-12.95 123.11,-12.849 123.11,-12.251 123.008,-12.15 122.704,-12.15 122.603,-12.251 122.603,-12.849 122.502,-12.95 106.21,-12.95 103.06,-9.8 100.348,-9.8 100.2,-9.652 100.2,-9 100.05,-8.85 99.7,-8.85 99.55,-9 99.55,-9.4 99.45,-9.5 99.1,-9.5 99,-9.4 99,-9.05 98.85,-8.9 98.6,-8.9 98.45,-9.05 98.45,-9.186 98.45,-9.35 98.3,-9.5 95.864,-9.5 95.45,-9.086 95.45,-8.814 95.186,-8.55 94.914,-8.55 94.45,-8.086 94.45,-7.814 94.186,-7.55 93.914,-7.55 93.45,-7.086 93.45,-6.814 93.186,-6.55 92.914,-6.55 92.45,-6.086 92.45,-5.814 92.186,-5.55 91.86,-5.55
Q1_K_P: IC33.H19 IC42.B6 | length 48.1
  Top Layer w0.125: IC33.H19@91.5,-0.5 v1(92,-1) ; IC42.B6@123.75,-9.4 123.75,-9.708 124.278,-10.236 124.278,-12 124.378,-12.1 124.465,-12.1 v1(124.6,-12.1)
  Mid-Layer 2 w0.1: v1(92,-1) 91.45,-1.55 90.814,-1.55 90.5,-1.864 90.5,-5.2 90.8,-5.5 91.486,-6.186 91.75,-6.45 92.086,-6.45 92.55,-6.914 92.55,-7.186 92.814,-7.45 93.086,-7.45 93.55,-7.914 93.55,-8.186 93.814,-8.45 94.086,-8.45 94.55,-8.914 94.55,-9.186 94.814,-9.45 95.086,-9.45 95.55,-9.914 95.55,-10.186 95.814,-10.45 99.186,-10.45 99.476,-10.161 102.911,-10.161 106.061,-13.311 123.589,-13.311 124.319,-12.581 124.319,-12.246 124.465,-12.1 v1(124.6,-12.1)
Q1_Q0: IC33.C18 IC42.P11 | length 48.2
  Top Layer w0.175: IC33.C18@96.5,0.5 v1(97,0) ; v1(118.25,3.1) IC42.P11@118.75,2.6
  Mid-Layer 3 w0.109: v1(97,0) 98.05,1.05 98.05,1.3 98.136,1.386 98.225,1.386 98.288,1.45 98.6,1.45 98.723,1.327 98.723,0.637 98.826,0.534 99.135,0.534 99.239,0.637 99.239,1.746 99.342,1.849 99.651,1.849 99.754,1.746 99.754,1.053 99.857,0.95 100,0.95 101.009,1.959 101.009,2.105 100.731,2.384 100.731,2.529 100.95,2.748 101.095,2.748 101.447,2.397 101.708,2.135 101.854,2.135 102.073,2.354 102.073,2.499 101.811,2.761 101.46,3.112 101.46,3.258 101.678,3.477 101.824,3.477 102.176,3.126 102.437,2.864 102.583,2.864 102.802,3.083 102.802,3.228 102.54,3.49 102.189,3.841 102.189,3.987 102.407,4.206 102.553,4.206 102.832,3.927 102.977,3.927 103.4,4.35 103.805,4.35 103.908,4.453 103.908,4.847 104.011,4.95 104.32,4.95 104.423,4.847 104.423,4.116 104.526,4.013 104.835,4.013 104.938,4.116 104.938,4.847 105.042,4.95 105.351,4.95 105.454,4.847 105.454,4.453 105.557,4.35 105.866,4.35 105.969,4.453 105.969,4.847 106.072,4.95 106.382,4.95 106.485,4.847 106.485,4.453 106.588,4.35 106.897,4.35 107,4.453 107,4.847 107.103,4.95 107.412,4.95 107.515,4.847 107.515,4.453 107.619,4.35 107.9,4.35 108.15,4.1 108.35,4.1 108.408,4.158 108.408,4.947 108.511,5.05 108.82,5.05 108.923,4.947 108.923,4.119 109.026,4.016 109.335,4.016 109.438,4.119 109.438,4.947 109.542,5.05 109.851,5.05 109.954,4.947 109.954,4.553 110.057,4.45 110.366,4.45 110.469,4.553 110.469,4.947 110.572,5.05 110.882,5.05 110.985,4.947 110.985,4.553 111.088,4.45 111.397,4.45 111.5,4.553 111.5,4.947 111.603,5.05 111.912,5.05 112.015,4.947 112.015,4.553 112.119,4.45 112.428,4.45 112.531,4.553 112.531,4.947 112.634,5.05 112.943,5.05 113.046,4.947 113.046,4.553 113.149,4.45 113.459,4.45 113.562,4.553 113.562,4.947 113.665,5.05 113.974,5.05 114.077,4.947 114.077,4.187 114.18,4.084 114.489,4.084 114.592,4.187 114.592,4.947 114.696,5.05 115.005,5.05 115.108,4.947 115.108,4.187 115.211,4.084 115.52,4.084 115.623,4.187 115.623,4.947 115.726,5.05 116.036,5.05 116.139,4.947 116.139,3.992 116.242,3.889 116.551,3.889 117.04,3.4 117.95,3.4 v1(118.25,3.1)
Q1_Q1: IC33.E24 IC42.M10 | length 48.1
  Top Layer w0.175: IC33.E24@94.5,-5.5 v1(95,-6) ; v1(119.25,1.1) IC42.M10@119.75,0.6
  Mid-Layer 3 w0.109: v1(95,-6) 95.45,-5.55 95.45,-3.542 95.347,-3.438 94.953,-3.438 94.85,-3.335 94.85,-3.026 94.953,-2.923 95.865,-2.923 95.968,-2.82 95.968,-2.511 95.865,-2.408 95.553,-2.408 95.45,-2.305 95.45,-1.65 95.6,-1.5 97.75,-1.5 97.871,-1.379 98.541,-1.379 98.644,-1.276 98.644,-0.683 98.747,-0.58 99.056,-0.58 99.159,-0.683 99.159,-1.276 99.262,-1.379 99.921,-1.379 100.184,-1.116 100.184,-0.97 100.047,-0.833 100.047,-0.687 100.266,-0.468 100.412,-0.468 100.622,-0.678 100.784,-0.841 100.93,-0.841 101.149,-0.622 101.149,-0.477 100.986,-0.314 100.776,-0.104 100.776,0.042 100.995,0.26 101.141,0.26 101.351,0.051 101.513,-0.112 101.659,-0.112 101.878,0.107 101.878,0.252 101.505,0.625 101.505,0.771 101.724,0.989 101.869,0.989 102.242,0.617 102.388,0.617 102.607,0.835 102.607,0.981 102.444,1.144 102.234,1.354 102.234,1.5 102.453,1.718 102.598,1.718 102.808,1.508 102.971,1.346 103.117,1.346 103.335,1.564 103.335,1.71 103.173,1.873 102.963,2.083 102.963,2.228 103.181,2.447 103.327,2.447 103.537,2.237 103.721,2.053 103.867,2.053 104.085,2.272 104.085,2.418 103.975,2.529 103.975,2.675 104.4,3.1 104.555,3.1 104.658,2.997 104.658,2.841 104.761,2.738 105.07,2.738 105.173,2.841 105.173,2.997 105.276,3.1 108.3,3.1 108.6,2.8 109.605,2.8 109.708,2.903 109.708,3.297 109.811,3.4 110.12,3.4 110.223,3.297 110.223,2.903 110.326,2.8 110.635,2.8 110.738,2.903 110.738,3.297 110.842,3.4 111.151,3.4 111.254,3.297 111.254,2.903 111.357,2.8 111.666,2.8 111.769,2.903 111.769,3.297 111.872,3.4 112.182,3.4 112.285,3.297 112.285,2.903 112.388,2.8 112.697,2.8 112.8,2.903 112.8,3.297 112.903,3.4 113.212,3.4 113.315,3.297 113.315,2.903 113.419,2.8 113.728,2.8 113.831,2.903 113.831,3.297 113.934,3.4 114.243,3.4 114.346,3.297 114.346,2.903 114.449,2.8 114.759,2.8 114.862,2.903 114.862,3.297 114.965,3.4 115.274,3.4 115.377,3.297 115.377,2.903 115.48,2.8 116.15,2.8 116.55,2.4 116.9,2.4 117.7,1.6 118.75,1.6 v1(119.25,1.1)
Q1_Q2: IC33.C22 IC42.L11 | length 48
  Top Layer w0.175: IC33.C22@96.5,-3.5 v1(97,-4) ; v1(118.25,0.1) IC42.L11@118.75,-0.4
  Mid-Layer 3 w0.109: v1(97,-4) 97.43,-3.571 99.108,-3.571 99.212,-3.467 99.212,-3.274 99.315,-3.171 99.624,-3.171 99.727,-3.274 99.727,-3.867 99.83,-3.971 100.139,-3.971 100.242,-3.867 100.242,-3.674 100.345,-3.571 100.829,-3.571 101.134,-3.266 101.134,-3.12 100.927,-2.912 100.927,-2.766 101.145,-2.548 101.291,-2.548 101.572,-2.828 101.716,-2.973 101.862,-2.973 102.081,-2.754 102.081,-2.609 101.936,-2.464 101.655,-2.183 101.655,-2.037 101.874,-1.819 102.02,-1.819 102.301,-2.099 102.445,-2.244 102.591,-2.244 102.81,-2.026 102.81,-1.88 102.665,-1.735 102.384,-1.454 102.384,-1.309 102.603,-1.09 102.749,-1.09 103.174,-1.515 103.32,-1.515 103.539,-1.297 103.539,-1.151 103.394,-1.006 103.113,-0.725 103.113,-0.58 103.332,-0.361 103.478,-0.361 103.758,-0.642 103.903,-0.786 104.049,-0.786 104.267,-0.568 104.267,-0.422 104.123,-0.277 103.842,0.003 103.842,0.149 104.061,0.368 104.207,0.368 104.487,0.087 104.717,-0.143 104.863,-0.143 105.081,0.076 105.081,0.222 104.852,0.452 104.571,0.732 104.571,0.878 104.79,1.097 104.935,1.097 105.143,0.889 105.289,0.889 105.55,1.15 105.705,1.15 105.808,1.047 105.808,0.753 105.911,0.65 106.22,0.65 106.323,0.753 106.323,1.547 106.426,1.65 106.735,1.65 106.838,1.547 106.838,0.987 106.942,0.884 107.251,0.884 107.354,0.987 107.354,1.547 107.457,1.65 107.766,1.65 107.869,1.547 107.869,0.987 107.972,0.884 108.282,0.884 108.385,0.987 108.385,1.547 108.488,1.65 108.797,1.65 108.9,1.547 108.9,0.987 109.003,0.884 109.312,0.884 109.415,0.987 109.415,1.547 109.519,1.65 109.828,1.65 109.931,1.547 109.931,0.987 110.034,0.884 110.343,0.884 110.446,0.987 110.446,1.547 110.549,1.65 110.859,1.65 110.962,1.547 110.962,0.987 111.065,0.884 111.374,0.884 111.477,0.987 111.477,1.547 111.58,1.65 111.889,1.65 111.992,1.547 111.992,0.987 112.096,0.884 112.405,0.884 112.508,0.987 112.508,1.547 112.611,1.65 112.92,1.65 113.023,1.547 113.023,0.987 113.126,0.884 113.436,0.884 113.539,0.987 113.539,1.547 113.642,1.65 113.951,1.65 114.054,1.547 114.054,0.987 114.157,0.884 114.466,0.884 114.569,0.987 114.569,1.547 114.673,1.65 114.982,1.65 115.085,1.547 115.085,0.987 115.188,0.884 115.497,0.884 115.6,0.987 115.6,1.547 115.703,1.65 116.013,1.65 116.116,1.547 116.116,0.987 116.219,0.884 116.528,0.884 116.631,0.987 116.631,1.047 116.734,1.15 116.9,1.15 117.95,0.1 v1(118.25,0.1)
Q1_Q3: IC33.D24 IC42.K11 | length 48
  Top Layer w0.175: IC33.D24@95.5,-5.5 v1(96,-6) ; v1(118.25,-0.9) IC42.K11@118.75,-1.4
  Mid-Layer 3 w0.109: v1(96,-6) 96.43,-5.571 99.679,-5.571 100.15,-5.1 100.305,-5.1 100.505,-4.9 100.85,-4.9 100.923,-4.973 100.923,-5.272 101.026,-5.375 101.335,-5.375 101.438,-5.272 101.438,-4.803 101.542,-4.7 101.851,-4.7 101.954,-4.803 101.954,-4.997 102.057,-5.1 102.25,-5.1 102.75,-4.6 102.85,-4.6 102.959,-4.491 102.959,-4.345 102.61,-3.996 102.61,-3.85 102.829,-3.631 102.975,-3.631 103.324,-3.98 103.47,-3.98 103.688,-3.762 103.688,-3.616 103.339,-3.267 103.339,-3.121 103.558,-2.902 103.703,-2.902 104.053,-3.252 104.198,-3.252 104.417,-3.033 104.417,-2.887 104.068,-2.538 104.068,-2.392 104.287,-2.173 104.432,-2.173 104.782,-2.523 104.927,-2.523 105.146,-2.304 105.146,-2.158 104.797,-1.809 104.797,-1.663 105.015,-1.445 105.161,-1.445 105.77,-2.053 105.916,-2.053 106.135,-1.835 106.135,-1.689 105.536,-1.091 105.536,-0.945 105.755,-0.726 105.901,-0.726 106.734,-1.56 106.88,-1.56 107.099,-1.341 107.099,-1.195 106.75,-0.846 106.75,-0.7 106.9,-0.55 107.055,-0.55 107.158,-0.447 107.158,-0.154 107.261,-0.051 107.57,-0.051 107.673,-0.154 107.673,-0.447 107.776,-0.55 108.085,-0.55 108.188,-0.447 108.188,-0.187 108.292,-0.084 108.601,-0.084 108.704,-0.187 108.704,-0.797 108.807,-0.9 109.116,-0.9 109.219,-0.797 109.219,-0.187 109.322,-0.084 109.632,-0.084 109.735,-0.187 109.735,-0.797 109.838,-0.9 110.147,-0.9 110.25,-0.797 110.25,-0.187 110.353,-0.084 110.662,-0.084 110.765,-0.187 110.765,-0.447 110.869,-0.55 111.105,-0.55 111.208,-0.447 111.208,-0.187 111.311,-0.084 111.62,-0.084 111.723,-0.187 111.723,-0.797 111.826,-0.9 112.135,-0.9 112.238,-0.797 112.238,-0.187 112.342,-0.084 112.651,-0.084 112.754,-0.187 112.754,-0.797 112.857,-0.9 113.166,-0.9 113.269,-0.797 113.269,-0.187 113.372,-0.084 113.682,-0.084 113.785,-0.187 113.785,-0.797 113.888,-0.9 114.197,-0.9 114.3,-0.797 114.3,-0.187 114.403,-0.084 114.712,-0.084 114.815,-0.187 114.815,-1.064 114.919,-1.167 115.228,-1.167 115.331,-1.064 115.331,-0.187 115.434,-0.084 115.743,-0.084 115.846,-0.187 115.846,-0.797 115.949,-0.9 116.259,-0.9 116.362,-0.797 116.362,-0.237 116.465,-0.134 116.774,-0.134 116.877,-0.237 116.877,-0.797 116.98,-0.9 117.289,-0.9 117.392,-0.797 117.392,-0.653 117.496,-0.55 117.65,-0.55 117.8,-0.7 118.05,-0.7 v1(118.25,-0.9)
Q1_Q4: IC33.D25 IC42.J10 | length 48.1
  Top Layer w0.175: IC33.D25@95.5,-6.5 v1(96,-7) ; v1(119.25,-1.9) IC42.J10@119.75,-2.4
  Mid-Layer 3 w0.109: v1(96,-7) 96.5,-6.5 98.458,-6.5 98.562,-6.397 98.562,-6.203 98.665,-6.1 98.974,-6.1 99.077,-6.203 99.077,-6.397 99.18,-6.5 100.1,-6.5 100.355,-6.245 100.355,-6.05 100.458,-5.947 100.458,-5.653 100.561,-5.55 100.87,-5.55 100.973,-5.653 100.973,-5.947 101.076,-6.05 101.385,-6.05 101.488,-5.947 101.488,-5.653 101.592,-5.55 101.901,-5.55 102.004,-5.653 102.004,-5.947 102.107,-6.05 102.6,-6.05 102.709,-5.941 102.709,-5.795 102.502,-5.587 102.502,-5.441 102.72,-5.223 102.866,-5.223 103.147,-5.503 103.317,-5.674 103.463,-5.674 103.681,-5.455 103.681,-5.309 103.511,-5.139 103.23,-4.858 103.23,-4.712 103.449,-4.494 103.595,-4.494 103.876,-4.774 104.051,-4.95 104.197,-4.95 104.416,-4.732 104.416,-4.586 104.24,-4.41 103.959,-4.129 103.959,-3.984 104.178,-3.765 104.324,-3.765 104.823,-4.265 104.969,-4.265 105.188,-4.046 105.188,-3.9 104.969,-3.681 104.688,-3.4 104.688,-3.255 104.907,-3.036 105.053,-3.036 105.26,-3.244 105.406,-3.244 105.625,-3.025 105.625,-2.879 105.417,-2.672 105.417,-2.526 105.636,-2.307 105.782,-2.307 105.989,-2.515 106.135,-2.515 106.35,-2.3 106.8,-2.3 107.4,-1.7 107.855,-1.7 107.958,-1.597 107.958,-1.003 108.061,-0.9 108.37,-0.9 108.473,-1.003 108.473,-2.022 108.576,-2.125 108.885,-2.125 108.988,-2.022 108.988,-1.237 109.092,-1.134 109.401,-1.134 109.504,-1.237 109.504,-1.847 109.607,-1.95 109.916,-1.95 110.019,-1.847 110.019,-1.237 110.122,-1.134 110.432,-1.134 110.535,-1.237 110.535,-1.847 110.638,-1.95 110.947,-1.95 111.05,-1.847 111.05,-1.237 111.153,-1.134 111.462,-1.134 111.565,-1.237 111.565,-2.063 111.669,-2.166 111.978,-2.166 112.081,-2.063 112.081,-1.237 112.184,-1.134 112.493,-1.134 112.596,-1.237 112.596,-2.063 112.699,-2.166 113.009,-2.166 113.112,-2.063 113.112,-1.237 113.215,-1.134 113.524,-1.134 113.627,-1.237 113.627,-2.063 113.73,-2.166 114.039,-2.166 114.142,-2.063 114.142,-1.237 114.246,-1.134 114.555,-1.134 114.658,-1.237 114.658,-2.063 114.761,-2.166 115.07,-2.166 115.173,-2.063 115.173,-1.803 115.276,-1.7 115.55,-1.7 115.85,-1.4 116.005,-1.4 116.108,-1.297 116.108,-1.237 116.211,-1.134 116.52,-1.134 116.623,-1.237 116.623,-1.297 116.726,-1.4 117.035,-1.4 117.138,-1.297 117.138,-1.237 117.242,-1.134 117.551,-1.134 117.654,-1.237 117.654,-1.297 117.757,-1.4 118.75,-1.4 v1(119.25,-1.9)
Q1_Q5: IC33.B27 IC42.F11 | length 48.1
  Top Layer w0.175: IC33.B27@97.5,-8.5 v1(98,-9) ; v1(118.25,-5.9) IC42.F11@118.75,-5.4
  Mid-Layer 3 w0.109: v1(98,-9) 98.284,-9.284 99.046,-9.284 99.496,-9.734 100.116,-9.734 100.15,-9.7 100.45,-9.7 100.85,-10.1 101.52,-10.1 101.623,-10.203 101.623,-10.297 101.726,-10.4 102.19,-10.4 102.293,-10.297 102.293,-10.117 102.396,-10.014 102.705,-10.014 102.809,-10.117 102.809,-10.897 102.912,-11 103.221,-11 103.324,-10.897 103.324,-9.903 103.427,-9.8 103.736,-9.8 103.839,-9.903 103.839,-10.897 103.942,-11 104.252,-11 104.355,-10.897 104.355,-9.903 104.458,-9.8 104.767,-9.8 104.87,-9.903 104.87,-10.297 104.973,-10.4 105.2,-10.4 105.75,-9.85 105.75,-9.75 105.858,-9.642 105.858,-9.553 105.961,-9.45 106.27,-9.45 106.373,-9.553 106.373,-10.147 106.476,-10.25 106.785,-10.25 106.888,-10.147 106.888,-9.553 106.992,-9.45 107.301,-9.45 107.404,-9.553 107.404,-9.747 107.507,-9.85 107.65,-9.85 107.759,-9.741 107.905,-9.741 108.042,-9.878 108.188,-9.878 108.407,-9.659 108.407,-9.513 107.987,-9.093 107.987,-8.948 108.205,-8.729 108.351,-8.729 108.771,-9.149 108.917,-9.149 109.135,-8.93 109.135,-8.784 108.998,-8.647 108.998,-8.502 109.1,-8.4 109.77,-8.4 109.873,-8.503 109.873,-9.297 109.976,-9.4 110.285,-9.4 110.388,-9.297 110.388,-7.737 110.492,-7.634 110.801,-7.634 110.904,-7.737 110.904,-9.297 111.007,-9.4 111.316,-9.4 111.419,-9.297 111.419,-7.737 111.522,-7.634 111.832,-7.634 111.935,-7.737 111.935,-9.297 112.038,-9.4 112.347,-9.4 112.45,-9.297 112.45,-7.737 112.553,-7.634 112.862,-7.634 112.965,-7.737 112.965,-8.297 113.069,-8.4 113.45,-8.4 113.559,-8.291 113.705,-8.291 114.266,-8.852 114.412,-8.852 114.631,-8.633 114.631,-8.488 113.364,-7.221 113.364,-7.075 113.583,-6.857 113.729,-6.857 114.995,-8.123 115.141,-8.123 115.36,-7.904 115.36,-7.759 114.8,-7.199 114.8,-7.05 115.416,-6.434 115.755,-6.434 116.023,-6.166 116.684,-6.166 116.95,-5.9 v1(118.25,-5.9)
Q1_Q6: IC33.C27 IC42.E11 | length 45.2
  Top Layer w0.175: IC33.C27@96.5,-8.5 v1(97,-9) ; v1(118.25,-6.9) IC42.E11@118.75,-6.4
  Mid-Layer 3 w0.109: v1(97,-9) 97.5,-9.5 98.107,-9.5 98.571,-9.963 98.571,-10.178 98.843,-10.45 99.513,-10.45 99.616,-10.553 99.616,-10.847 99.719,-10.95 100.028,-10.95 100.131,-10.847 100.131,-10.553 100.234,-10.45 100.519,-10.45 101.053,-10.984 101.684,-10.984 101.8,-11.1 102.3,-11.1 102.7,-11.5 105.005,-11.5 105.108,-11.397 105.108,-11.373 105.211,-11.27 105.52,-11.27 105.623,-11.373 105.623,-11.397 105.726,-11.5 106.035,-11.5 106.138,-11.397 106.138,-11.287 106.242,-11.184 106.551,-11.184 106.654,-11.287 106.654,-11.397 106.757,-11.5 107.066,-11.5 107.169,-11.397 107.169,-11.287 107.272,-11.184 107.582,-11.184 107.685,-11.287 107.685,-11.397 107.788,-11.5 108.097,-11.5 108.2,-11.397 108.2,-11.103 108.303,-11 108.612,-11 108.715,-11.103 108.715,-11.397 108.819,-11.5 109.128,-11.5 109.231,-11.397 109.231,-11.103 109.334,-11 109.643,-11 109.746,-11.103 109.746,-11.397 109.849,-11.5 110.159,-11.5 110.262,-11.397 110.262,-11.187 110.365,-11.084 110.674,-11.084 110.777,-11.187 110.777,-11.397 110.88,-11.5 111.189,-11.5 111.292,-11.397 111.292,-11.187 111.396,-11.084 111.705,-11.084 111.808,-11.187 111.808,-11.397 111.911,-11.5 112.22,-11.5 112.323,-11.397 112.323,-11.187 112.426,-11.084 112.736,-11.084 112.839,-11.187 112.839,-11.397 112.942,-11.5 113,-11.5 113.109,-11.391 113.255,-11.391 113.463,-11.598 113.609,-11.598 113.827,-11.38 113.827,-11.234 113.266,-10.673 113.266,-10.527 113.485,-10.308 113.63,-10.308 114.192,-10.87 114.338,-10.87 114.556,-10.651 114.556,-10.505 114.348,-10.297 114.348,-10.152 114.5,-10 116.1,-10 116.209,-9.891 116.209,-9.745 115.966,-9.501 115.966,-9.355 116.184,-9.137 116.33,-9.137 117.21,-10.017 117.356,-10.017 117.575,-9.798 117.575,-9.652 116.448,-8.525 116.448,-8.38 116.666,-8.161 116.812,-8.161 117.303,-8.652 117.448,-8.652 117.7,-8.4 118.37,-8.4 118.473,-8.503 118.473,-8.516 118.576,-8.619 118.885,-8.619 118.988,-8.516 118.988,-8.503 119.092,-8.4 119.401,-8.4 119.504,-8.503 119.504,-8.523 119.607,-8.626 119.916,-8.626 120.019,-8.523 120.019,-8.503 120.122,-8.4 121.05,-8.4 121.12,-8.33 121.57,-8.33 121.75,-8.15 121.75,-7.6 121.6,-7.45 118.8,-7.45 v1(118.25,-6.9)